# Altium PCB 3 Channel Buck Converter PCB.PcbDoc (part 2 of 2)
Units mm, origin at the board's own origin, x right, y up, seen from the top; angles counter-clockwise.
Board outline 60 x 50 mm, 2 copper layers (Top Layer, Bottom Layer); 65 components, 39 nets, 165 pads, 74 vias.
Unrouted connection lines stored in the file: 123.
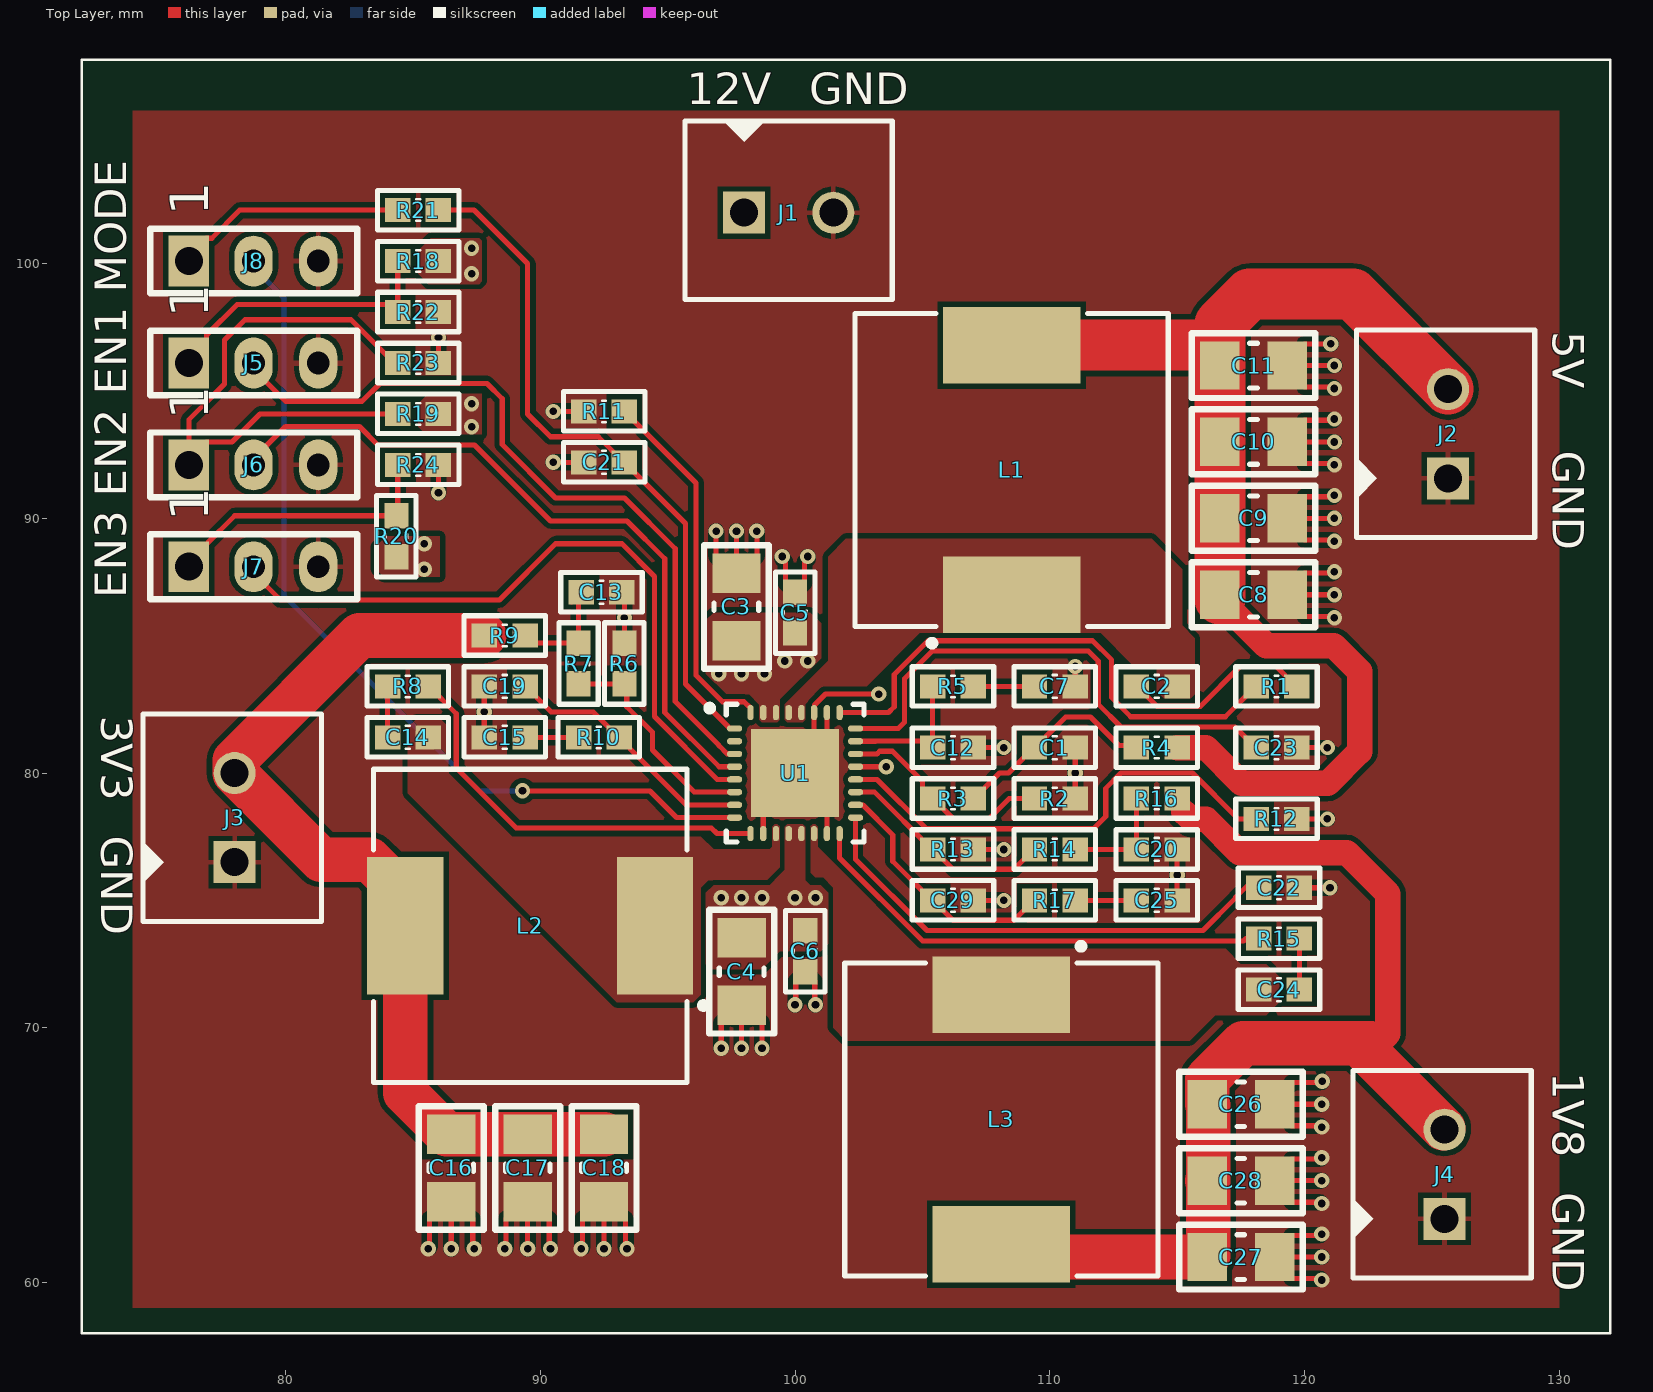
[diagram p0: Top Layer view]

## Via types
v1: diameter 0.6, hole 0.3, Top Layer to Bottom Layer, 74 vias

## Nets (pads, with @x,y where several pads share a name; then routed paths per layer and width w, separated by ;. In a path a pad name is that pad's centre, name@x,y a point inside that pad or via, vN(x,y) a via of type N, cw(c..) or ccw(c..) an arc to the next point about the centre after c; other vN are vias at no path point) (continued)
FB2: (continued)
  Top Layer w0.203: R7.1 R6.2 93.394,83.406 93.394,82.606 94.4,81.6 94.4,80.9 96.041,79.259 97.616,79.259 U1.6
FB3: R13.2 R14.1 U1.19 | length 8.6
  Top Layer w0.203: U1.19 103.125,79.25 R13.2@105.375,77 ; R13.2 105.425,77 106.205,76.22 108.595,76.22 109.375,77 R14.1
GND: C1.1 C3.1 C4.1 C5.1 C6.1 C7.2 C8.1 C9.1 C10.1 C11.1 C12.2 C13.1 C15.2 C16.1 C17.1 C18.1 C19.2 C20.1 C21.2 C22.1 C23.1 C25.2 C26.1 C27.1 C28.1 C29.2 J1.2 J2.1 J3.1 J4.1 J5.3 J6.3 J7.3 J8.3 R2.1 R6.1 R11.1 R12.1 R13.1 R22.1 R23.1 R24.1 U1.10 U1.15 U1.21 U1.26 U1.27 U1.33 | length 93.8
  Top Layer w0.203: v1@85.652,61.377 C16.1@85.652,62.502 ; v1(86,91) R24.1 ; R23.1 v1(86,97.1) ; v1(86.5,61.325) C16.1 ; v1@87.348,61.377 C16.1@87.348,62.502 ; C15.2 v1(87.8,82.4) C19.2 ; v1@88.652,61.377 C17.1@88.652,62.502 ; v1(89.5,61.325) C17.1 ; v1@90.348,61.377 C17.1@90.348,62.502 ; v1(90.502,92.198) C21.2 ; v1(90.502,94.198) R11.1 ; v1@91.652,61.377 C18.1@91.652,62.502 ; v1(92.5,61.325) C18.1 ; R6.1 v1(93.3,86.1) C13.1@93.3,87.1 ; v1@93.348,61.377 C18.1@93.348,62.502 ; v1(96.9,89.5) 96.9,88.523 97.573,87.85 C3.1 ; v1(97.1,69.2) 97.1,70.202 97.773,70.875 C4.1 ; v1(97.7,89.5) C3.1 ; v1(97.9,69.2) C4.1 ; v1(98.5,89.5) 98.5,88.523 97.827,87.85 C3.1 ; v1(98.7,69.2) 98.7,70.202 98.027,70.875 C4.1 ; U1.10 98.75,78.75 U1.33 ; v1(99.5,88.5) 99.5,88.393 99.627,88.266 99.627,87.473 C5.1 100.373,87.473 100.373,88.266 100.5,88.393 v1(100.5,88.5) ; v1(100,70.9) 100.027,70.927 100.027,71.827 C6.1 100.773,71.827 100.773,70.927 v1(100.8,70.9) ; U1.15 101.25,78.75 U1.33 ; U1.26 101.25,81.25 U1.33@100.75,80.75 ; U1.21 v1(103.575,80.25) ; v1(103.289,83.1) 101.192,83.1 100.759,82.667 100.759,82.384 U1.27 U1.33@100.75,80.75 ; C29.2 v1(108.2,75) ; R13.1 v1(108.2,77) ; C12.2 v1(108.2,81) ; R2.1 v1(111,80) C1.1 ; C7.2 v1(111,84.184) ; C25.2 v1(115,76) C20.1 ; C27.1 v1(120.675,61) ; C28.1 v1(120.675,64) ; C26.1 v1(120.675,67) ; C8.1 v1(121.175,87) ; C9.1 v1(121.175,90) ; C10.1 v1(121.175,93) ; C11.1 v1(121.175,96) ; C27.1@119.498,60.152 v1@120.623,60.152 ; C27.1@119.498,61.848 v1@120.623,61.848 ; C28.1@119.498,63.152 v1@120.623,63.152 ; C28.1@119.498,64.848 v1@120.623,64.848 ; C26.1@119.498,66.152 v1@120.623,66.152 ; C26.1@119.498,67.775 119.498,67.848 120.648,67.848 v1(120.7,67.9) ; R12.1 v1(120.9,78.2) ; C23.1 v1(120.9,81) ; C22.1 v1(121,75.5) ; C8.1@119.998,86.152 v1@121.123,86.152 ; C8.1@119.998,87.848 v1@121.123,87.848 ; C9.1@119.998,89.152 v1@121.123,89.152 ; C9.1@119.998,90.848 v1@121.123,90.848 ; C10.1@119.998,92.152 v1@121.123,92.152 ; C10.1@119.998,93.848 v1@121.123,93.848 ; C11.1@119.998,95.152 v1@121.123,95.152 ; C11.1@119.998,96.848 v1(121.03,96.848) ; U1.33 U1.33@100.75,80.75
  other v1: 120.675,60.1 85.6,61.325 87.4,61.325 88.6,61.325 90.4,61.325 91.6,61.325 93.4,61.325 120.675,61.9 120.675,63.1 120.675,64.9 120.675,66.1 121.175,86.1 121.175,87.9 121.175,89.1 121.175,90.9 121.175,92.1 121.175,93.9 121.175,95.1
LX1: C2.2 L1.1 U1.28 U1.29
LX2: C14.2 L2.1 U1.11
LX3: C24.2 L3.1 U1.14
MODE: J8.2 U1.8 | length 34.9
  Top Layer w0.203: v1(89.3,79.3) 94.3,79.3 95.35,78.25 U1.8
  Bottom Layer w0.203: J8.2 78.74,99.85 79.94,98.65 79.94,86.96 87.6,79.3 v1(89.3,79.3)
NetC1_2: C1.2 R3.2 R4.1 | length 8.2
  Top Layer w0.203: R3.2 107.025,79 108.025,80 108.375,80 109.375,81 C1.2 109.425,81 110.625,82.2 111.6,82.2 112.714,81.086 113.314,81.086 R4.1
NetC2_1: C2.1 R1.1 | length 7.6
  Top Layer w0.203: C2.1 113.425,83.4 114.205,82.62 115.914,82.62 117.474,84.18 118.895,84.18 119.675,83.4 R1.1
NetC7_1: C7.1 R5.2 | length 2.4
  Top Layer w0.203: R5.2 C7.1
NetC13_2: C13.2 R7.2 R9.1 | length 4.6
  Top Layer w0.203: R9.1@89.425,85.4 R9.1 89.7,85.1 R7.2 C13.2@91.5,86.9 ; C13.2@91.227,86.727 91.4,86.9 C13.2
NetC14_1: C14.1 R8.1 | length 2
  Top Layer w0.203: C14.1 R8.1
NetC15_1: C15.1 R10.2 | length 2.1
  Top Layer w0.203: C15.1 R10.2
NetC20_2: C20.2 R14.2 R16.1 | length 4.4
  Top Layer w0.203: R14.2 C20.2 R16.1
NetC24_1: C24.1 R15.1 | length 2
  Top Layer w0.203: C24.1 R15.1
NetC25_1: C25.1 R17.2 | length 2.4
  Top Layer w0.203: R17.2 C25.1
NetJ5_1: J5.1 R18.1 R22.2 | length 11.5
  Top Layer w0.203: J5.1 76.898,96.798 76.898,97.198 78.1,98.4 84.1,98.4 R22.2 R18.1
NetJ6_1: J6.1 R19.1 R23.2 | length 22.3
  Top Layer w0.203: J6.1 J6.1@76.2,92.3 ; R23.2@84.365,96.023 84.34,96.023 82.563,97.8 78.4,97.8 77.6,97 77.6,95.269 76.2,93.869 J6.1@76.2,92.3 ; R19.1 78.998,94.1 77.897,92.998 76.898,92.998 J6.1@76.2,92.3
NetJ7_1: J7.1 R20.1 R24.2 | length 11.1
  Top Layer w0.203: J7.1 76.2,88.3 76.898,88.998 78,90.1 84.4,90.1 R24.2
NetJ8_1: J8.1 R21.1 | length 9.1
  Top Layer w0.203: J8.1 76.2,100.3 76.898,100.998 77.098,100.998 78.2,102.1 R21.1
PG_DLY: C23.2 U1.24 | length 20.5
  Top Layer w0.203: U1.24 104.05,81.75 104.294,81.994 104.294,82.394 104.3,82.4 104.3,83.706 105.383,84.789 111.511,84.789 111.9,84.4 111.9,82.7 112.795,81.805 117.27,81.805 118.075,81 C23.2
PSM: R11.2 U1.32 | length 14.4
  Top Layer w0.203: R11.2 93.327,94.198 93.7,93.825 93.7,93.8 96.106,91.394 96.106,83.843 97.15,82.8 98,82.8 98.25,82.55 U1.32
ROSC: R12.2 U1.20 | length 18.8
  Top Layer w0.203: U1.20 103.22,79.75 105.156,77.814 111.714,77.814 112.2,78.3 112.2,79.4 112.8,80 115.6,80 117.4,78.2 R12.2
SEQ_DLY: C22.2 U1.17 | length 19.1
  Top Layer w0.203: U1.17 102.375,76.619 105.18,73.814 116.014,73.814 117.302,75.102 117.302,75.127 117.887,75.712 C22.2@117.912,75.712
V7V: C21.1 R21.2 U1.1 | length 27.2
  Top Layer w0.203: R21.2 87.4,102.1 89.5,100 89.5,94.1 90.4,93.2 92.275,93.2 93.277,92.198 C21.1 93.327,92.198 93.7,91.825 93.7,91.8 95.7,89.8 95.7,83.5 97.45,81.75 U1.1
pads on no net: U1.2

## Polygon pours and split planes (outlines as drawn)
GND on Top Layer "GND_L01_P046" (solid, pour order 46): 74,106 130,106 130,59 74,59
+12 on Top Layer "+12_L01_P042" (solid, pour order 42): 83.55,88.9 83.95,89.3 86.05,89.3 86.05,87.7 83.85,87.7 83.55,88
+12 on Top Layer "+12_L01_P036" (solid, pour order 36): 85.2,94.5 85.6,94.9 87.7,94.9 87.7,93.3 85.5,93.3 85.2,93.6
+12 on Top Layer "+12_L01_P031" (solid, pour order 31): 98.6,82.1 98.7,82 99.3,82 99.4,82.1 99.4,82.894 101.021,84.515 101.021,85.879 100.6,86.3 96.8,86.3 96.5,86 96.5,83.9 97.3,83.1 98.2,83.1 98.2,83.084 98.584,82.7 98.6,82.7
LX1 on Top Layer "Top Layer-LX1" (solid, pour order 15): 112,85.5 113.2,84.3 114.2,84.3 114.2,83.2 114.5,82.9 115.5,82.9 115.7,83.1 115.7,85.3 115.2,85.8 115.2,88 114,89.2 102,89.2 101.3,88.5 101.3,84.4 99.6,82.7 99.6,82.1 99.7,82 100.3,82 100.4,82.1 100.4,82.7 101.1,83.4 102.8,83.4 104.9,85.5
+12 on Top Layer "+12_L01_P018" (solid, pour order 18): 85.2,100.5 85.7,101 87.6,101 87.7,100.9 87.7,99.3 87.6,99.2 85.6,99.2 85.2,99.6
LX2 on Top Layer "LX2_L01_P007" (solid, pour order 7): 88.9,77.5 96.3,77.5 96.8,77 99,77 99.1,77.1 99.1,77.9 99.2,78 99.3,78 99.4,77.9 99.4,76.3 98.9,75.8 96.6,75.8 96.3,75.5 96.3,71.3 96,71 93,71 84.8,79.2 84.8,81.8 85.1,82.1 86.1,82.1 86.4,81.8 86.4,80
LX3 on Top Layer "Top Layer-LX3" (solid, pour order 12): 100.6,76.1 100.8,75.9 101.1,75.9 101.5,75.5 101.5,70 102,69.5 115.5,69.5 116.5,70.5 118.5,70.5 119,71 119,72 118.5,72.5 117.5,72.5 116.903,73.097 111.003,73.097 111,73.1 104.9,73.1 100.9,77.1 100.9,77.9 100.8,78 100.7,78 100.6,77.9
+12 on Top Layer "+12V TOP" (solid, pour order 5): 98.7,72.3 99.4,73 101,73 101.3,73.3 101.3,75.3 101,75.6 100.6,75.6 100.4,75.8 100.4,77.9 100.3,78 99.7,78 99.6,77.9 99.6,76.2 99.4,76 99,75.6 96.8,75.6 96.5,75.3 96.5,72.5 96.7,72.3
GND on Bottom Layer "GND_L02_P045" (solid, pour order 45): 74,106 130,106 130,59 74,59
+12 on Bottom Layer "Bottom Layer-+12" (solid, pour order 44): 97,74 103,74 104,75 104,78 102,80 102,84 101,85 97,85 96,86 96,91 97,92 102,92 104,94 104,97 100,101 100,102.5 98.5,104 89,104 86,101 86,99 90,95 92,95 92,90 90,90 88.5,91.5 88.5,94.5 88,95 87,95 86.5,94.5 86.5,89.5 85.5,89.5 85,89 85,88 85.5,87.5 87.5,87.5 88,88 93,88 92,89 94,87 94,77

## Silkscreen, mask and mechanical layers (free items; w line width, h text height)
Top Overlay:
  the board outline again, w0.1
  text "12V" at 95.754,106.254 h1.25
  text "GND" at 100.554,106.254 h1.25
  text "MODE" at 73.746,98.854 h1.25 r90
  text "5V" at 129.754,97.346 h1.25 r270
  text "EN1" at 73.746,94.854 h1.25 r90
  text "GND" at 129.754,92.646 h1.25 r270
  text "EN2" at 73.746,90.854 h1.25 r90
  text "EN3" at 73.746,86.854 h1.25 r90
  text "3V3" at 72.754,82.246 h1.25 r270
  text "GND" at 72.754,77.546 h1.25 r270
  text "1V8" at 129.754,68.246 h1.25 r270
  text "GND" at 129.754,63.546 h1.25 r270

## Text inside footprints (layer, text, board x,y; h text height)
J5: Top Overlay "1" at 76.962,97.878 h1.52 r90
J6: Top Overlay "1" at 76.962,93.878 h1.52 r90
J7: Top Overlay "1" at 76.962,89.878 h1.52 r90
J8: Top Overlay "1" at 76.962,101.878 h1.52 r90